# Altium PCB PCB1.PcbDoc
Units mil, origin at the board's own origin, x right, y up, seen from the top; angles counter-clockwise.
Board outline 6000 x 4000 mil, 2 copper layers (Top Layer, Bottom Layer); 18 components, 24 nets, 96 pads, 0 vias.
Unrouted connection lines stored in the file: 3.
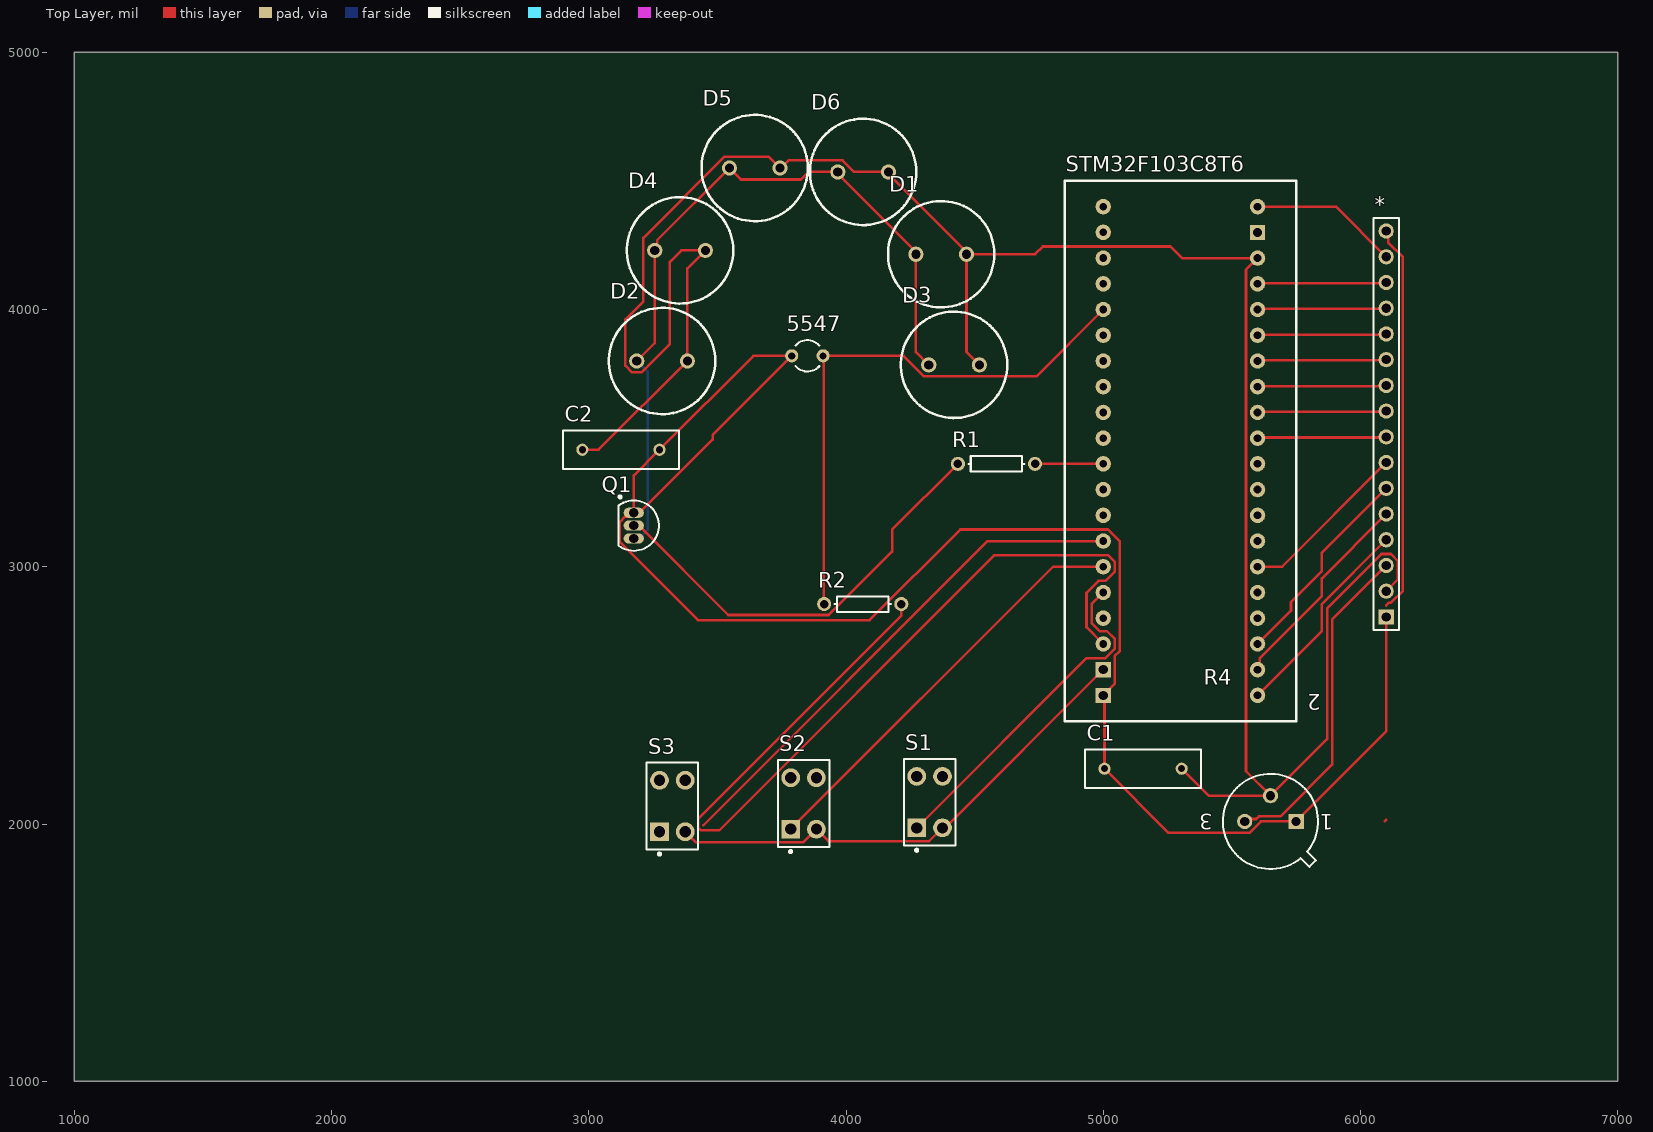
[diagram p0: Top Layer view]
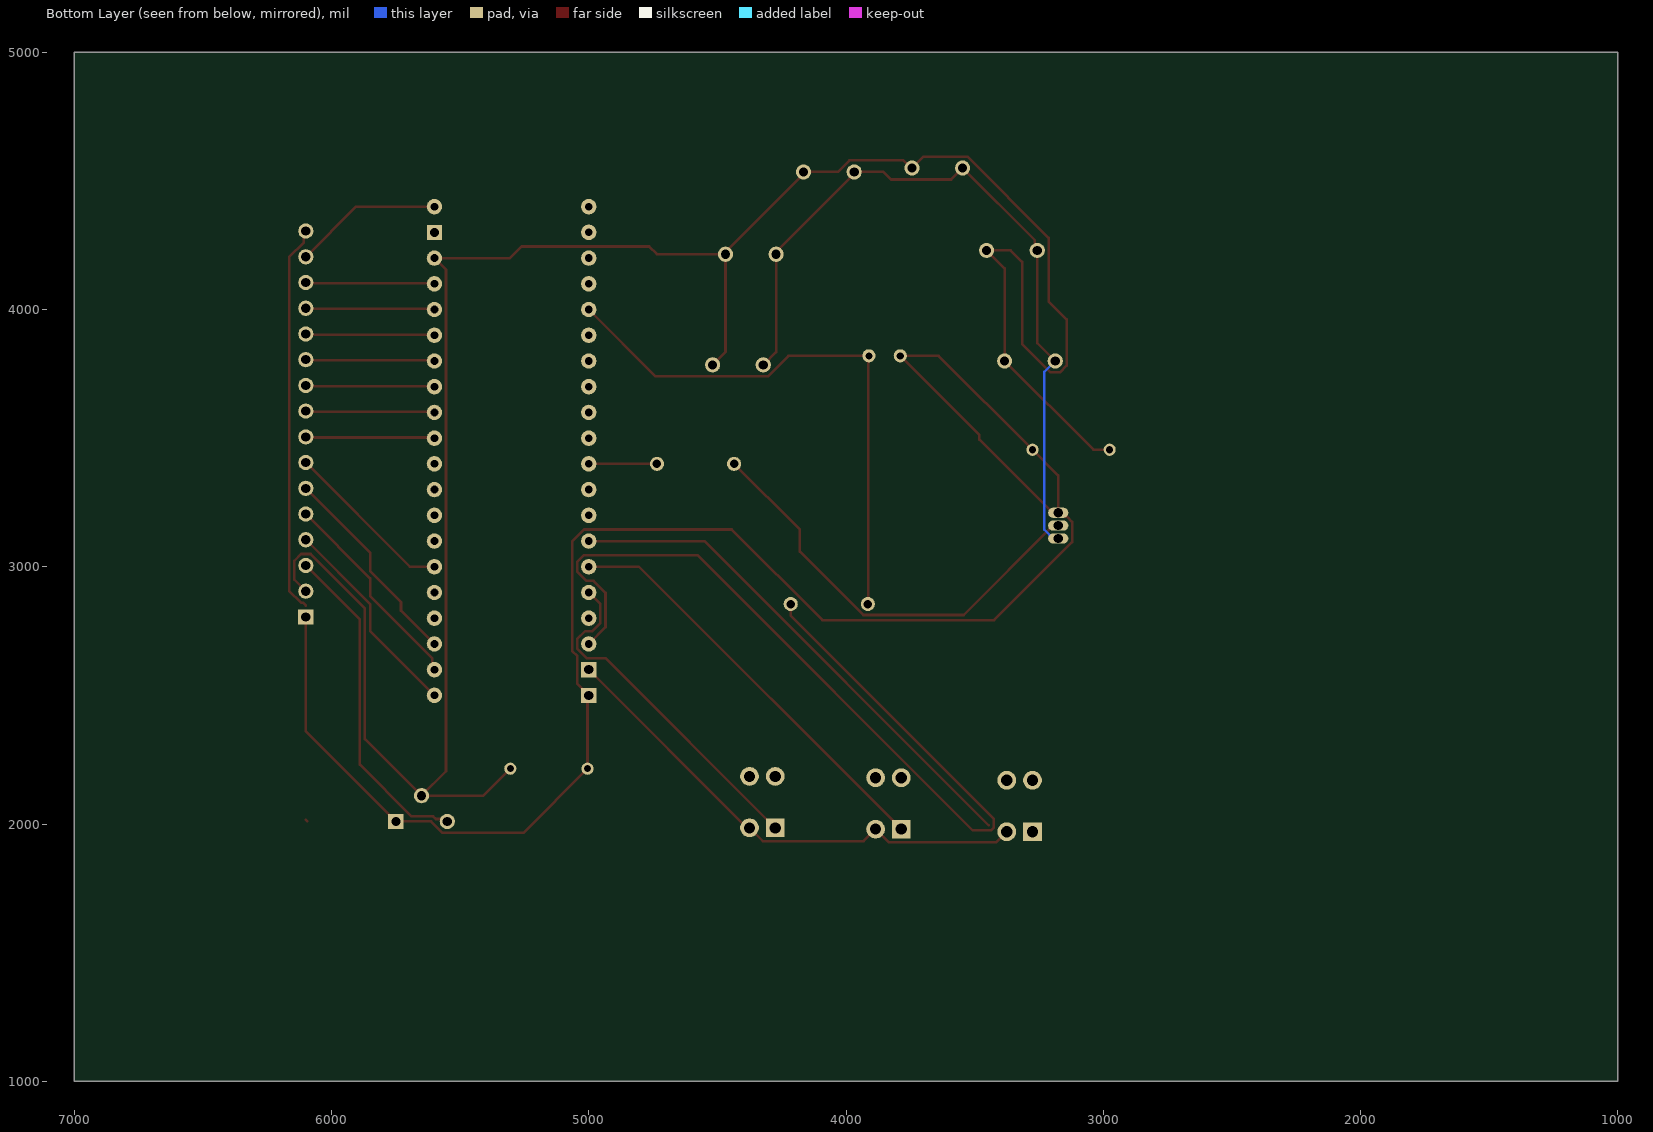
[diagram p1: Bottom Layer view, seen from below]

## Layer stack, top to bottom
Top Solder: solder mask 0.4, Solder Resist, Dk 3.5
Top Layer: signal copper 1.4
Dielectric 1: dielectric 12.6, FR-4, Dk 4.8
Bottom Layer: signal copper 1.4
Bottom Solder: solder mask 0.4, Solder Resist, Dk 3.5

## Board outline
1000,1000 7000,1000 7000,5000 1000,5000

## Design rules (kind name [scope] priority, off if disabled: settings)
Clearance [All] p1: gap=10 ignorepadtopadclearanceinfootprint=FALSE except(0: Arc-Hole Track-Hole SMDPad-Hole THPad-Hole Via-Hole Fill-Hole Poly-Hole Region-Hole Text-Hole)
PolygonConnect [All] p1: connectstyle=Relief reliefconductorwidth=10 reliefentries=4 polygonreliefangle="90 Angle" airgapwidth=10
RoutingVias [All] p1: holewidth=28 width=50 viastyle="Through Hole" minholewidth=28 minwidth=50 maxholewidth=28 maxwidth=50
SolderMaskExpansion [All] p1: expansion=4 istentingtop=FALSE
Width [All] p1: maxlimit=10 minlimit=10 preferedwidth=10
30 further rules are at their usual default settings.

## Components (designator, comment, footprint, x,y, rotation, side; value= is the part's Value field where it differs from the comment)
5547 "光敏电阻" R38 3850,3820 r90 top value=1K
* "LCD1602" HDR1X16 6100,2805 r90 top
C1 "104" RAD-0.3 5155,2215 r180 top value=100pF
C2 "104" RAD-0.3 3125,3455 r180 top value=100pF
D1 "LED" RB5-10.5 4370,4215 r180 top
D2 "LED" RB5-10.5 3285,3800 r180 top
D3 "LED" RB5-10.5 4420,3785 r180 top
D4 "LED" RB5-10.5 3355,4230 r180 top
D5 "LED" RB5-10.5 3645,4550 r180 top
D6 "LED" RB5-10.5 4066.57,4535 r180 top
Q1 "8550" TO-92A 3175,3160 r180 top
R1 "100" AXIAL-0.3 4585,3400 r180 top value=1K
R2 "Res1" AXIAL-0.3 4065,2855 r0 top value=1K
R4 "RPot" TO-205AF 5650,2010 r180 top value=10K
S1 "SW-PB" DPST-4 4325,2085 r90 top
S2 "SW-PB" DPST-4 3835,2080 r90 top
S3 "SW-PB" DPST-4 3325,2070 r90 top
STM32F103C8T6 "STM32F103C8T6" HDR1X20 4850,4500 r270 top

## Footprints (in the part's own frame and the unit in brackets; to place one, negate y for a bottom-side part, rotate by r counter-clockwise, add the part's x,y. Pads: shape width x height; smd on the part's side, far side on the other; paste and mask are expansions set on the pad)
AXIAL-0.3 [mm] "Axial Device, Thru-Hole; 2 Leads; 0.3 in Pin Spacing"
  round 1.4 hole 0.85: 1(-3.81,0) 2(3.81,0)
  silkscreen extent -2.77,-0.76 2.77,0.76
DPST-4 [mm] "Switch; 4 Leads"
  rect 1.85x1.85 hole 1.1: 1(-2.54,1.27)
  round 1.85 hole 1.1: 2(-2.54,-1.27) 3(2.54,-1.27) 4(2.54,1.27)
  silkscreen extent -4.88,-2.54 4.28,2.54
HDR1X16 [mm] "Connector; Header; 16 Position"
  rect 1.5x1.5 hole 0.9: 1(0,0)
  round 1.5 hole 0.9: 2(2.54,0) 3(5.08,0) 4(7.62,0) 5(10.16,0) 6(12.7,0) 7(15.24,0) 8(17.78,0) 9(20.32,0) 10(22.86,0) 11(25.4,0) 12(27.94,0) 13(30.48,0) 14(33.02,0) 15(35.56,0) 16(38.1,0)
  silkscreen extent -1.27,-1.27 39.37,1.27
HDR1X20 [mil] "Connector; Header; 20 Position"
  round 60 hole 30: 0(100,150) 1(200,150) 2(300,150) 3(400,150) 4(500,150) 5(600,150) 6(700,150) 7(800,150) 8(900,150) 9(1000,150) 10(1100,150) 11(1200,150) 12(1300,150) 13(1400,150) 14(1500,150) 15(1600,150) 16(1700,150) 17(1800,150) 20(2000,750) 21(1900,750) 22(1800,750) 23(1700,750) 24(1600,750) 25(1500,750) 26(1400,750) 27(1300,750) 28(1200,750) 29(1100,750) 30(1000,750) 31(900,750) 32(800,750) 33(700,750) 34(600,750) 35(500,750) 36(400,750) 37(300,750) 39(100,750)
  rect 59.06x59.06 hole 35.43: 18(1900,150) 19(2000,150) 38(200,750)
  silkscreen extent 0,0 2100,900
R38 [mm] "Crystal, Thru-Hole; 2 Leads; Body 3.1 x 8.2 mm (Dia.xH)"
  round 1.3 hole 0.7: 1(0,1.55) 2(0,-1.55)
  silkscreen extent -1.55,-1.19 1.55,1.17
RAD-0.3 [mm] "Radial Cap, Thru-Hole; 2 Leads; 0.3 in Pin Spacing"
  round 1.2 hole 0.7: 1(-3.81,0) 2(3.81,0)
  silkscreen extent -5.71,-1.91 5.71,1.91
RB5-10.5 [mm] "Capacitor (Radial); 2 Leads"
  round 1.5 hole 0.9: 1(-2.5,0) 2(2.5,0)
  silkscreen extent -5.25,-5.25 5.25,5.25
TO-92A [mm] "TO, Flat Index; 3 In-Line, Axial Leads; Body Dia. 4.5mm; Leads 0.51 x 0.48 mm (max)"
  oval 2x1 hole 0.9: 1(0,-1.27) 2(0,0) 3(0,1.27)
  silkscreen extent -2.48,-2.95 1.5,2.48, body extent -2.48,-2.5 1.5,2.5, height 6.86
TO-205AF [mm] "Can; 3 Leads; Pin Circle Dia. 5.08 mm; Lead Dia. 0.53 mm (max)"
  rect 1.5x1.5 hole 0.9: 1(-2.54,0)
  round 1.5 hole 0.9: 2(0,-2.54) 3(2.54,0)
  silkscreen extent -4.7,-4.7 4.7,4.7

## Part data
5547 R1: library part Res1, "Resistor", LatestRevisionDate=17-Jul-2002, LatestRevisionNote="Re-released for DXP Platform.", PackageDescription="Axial Device, Thru-Hole; 2 Leads; 0.3 in Pin Spacing", PackageReference=AXIAL-0.3, Published=8-Jun-2000, Publisher="Altium Limited"
C1 C2: library part Cap, "Capacitor", LatestRevisionDate=17-Jul-2002, LatestRevisionNote="Re-released for DXP Platform.", PackageDescription="Radial Cap, Thru-Hole; 2 Leads; 0.3 in Pin Spacing", PackageReference=RAD-0.3, Published=8-Jun-2000, Publisher="Altium Limited"
D1 D2 D3 D4 D5 D6: library part LED0, "Typical INFRARED GaAs LED", LatestRevisionDate=08-Jul-2005, LatestRevisionNote="Mech Layer 1 removed.", PackageDescription="LED; 2 Leads", PackageReference=LED-0, Published=8-Jun-2000, Publisher="Altium Limited"
Q1: library part PNP, "PNP Bipolar Transistor", LatestRevisionDate=29-May-2009, LatestRevisionNote="IPC-7351 Footprint Added.", PackageDescription="3-Pin SOT-23 Package 0.95 mm Pitch, 2.4 mm Lead Span", PackageReference=SOT-23B, PackageVersion=Aug-1999, Published=8-Jun-2000, Publisher="Altium Limited"
R2: "Resistor", LatestRevisionDate=17-Jul-2002, LatestRevisionNote="Re-released for DXP Platform.", PackageDescription="Axial Device, Thru-Hole; 2 Leads; 0.3 in Pin Spacing", PackageReference=AXIAL-0.3, Published=8-Jun-2000, Publisher="Altium Limited"
R4: "Potentiometer", LatestRevisionDate=17-Jul-2002, LatestRevisionNote="Re-released for DXP Platform.", PackageDescription="Variable Resistor, Thru-Hole; 3 Leads", PackageReference=VR5, Published=8-Jun-2000, Publisher="Altium Limited", Set Position=0.5, Sim Note="Enter the Resistance value and the set point into parameter fields."
S1 S2 S3: "Switch", LatestRevisionDate=17-Jul-2002, LatestRevisionNote="Re-released for DXP Platform.", PackageDescription="Switch; 2 Leads", PackageReference=SPST-2, Published=24-Mar-1999, Publisher="Altium Limited"

## Nets (pads, with @x,y where several pads share a name; then routed paths per layer and width w, separated by ;. In a path a pad name is that pad's centre, name@x,y a point inside that pad or via, vN(x,y) a via of type N, cw(c..) or ccw(c..) an arc to the next point about the centre after c; other vN are vias at no path point)
3.3V: R2.2 STM32F103C8T6.17 | length 3681.6
  Top Layer w10: R2.2 4215,2809.75 3425,2019.75 3425,1986.72 3436.72,1975 3507.28,1975 4577.28,3045 5018.64,3045 5045,3018.64 5045,2981.36 5008.64,2945 4981.36,2945 4935,2898.64 4935,2765 STM32F103C8T6.17
5V: *.2 C1.1 C2.2 D1.1 D2.1 D3.1 D4.1 D5.1 D6.1 R4.2 STM32F103C8T6.37 | length 9299.7
  Top Layer w10: C2.2 3038.43,3455 D2.1 3383.43,4160 D4.1 3359.83,4230 3315.31,4185.47 3315.31,3865.76 3205.02,3755.47 3168.13,3755.47 3142.05,3781.56 3142.05,3961.56 3212.05,4031.56 3212.05,4278.44 3528.13,4594.53 3698.9,4594.53 D5.1 3747.34,4550 3776.87,4579.53 3986.59,4579.53 4031.12,4535 D6.1 4165,4526.71 4468.43,4223.29 D1.1 ; D3.1 4468.43,3835 D1.1 ; C1.1 5410,2110 R4.2 ; *.2 6144.53,2949.53 6144.53,3023.44 6118.44,3049.53 6081.56,3049.53 5870.17,2838.14 5870.17,2330.17 R4.2 ; D1.1 4735.17,4215 4765.17,4245 5261.42,4245 5306.42,4200 STM32F103C8T6.37 5555,4155 5555,2205 R4.2
ADC1_IN0: 5547.2 R2.1 STM32F103C8T6.4 | length 2196.1
  Top Layer w10: R2.1 3913.01,2856.99 3913.01,3818.01 5547.2 4223.6,3820 4303.13,3740.47 4740.47,3740.47 STM32F103C8T6.4
GND: 5547.1 *.1 *.16 C1.2 C2.1 Q1.1 R4.1 STM32F103C8T6.19 | length 8452.7
  Top Layer w10: Q1.1 3175,3355 C2.1 3640,3820 5547.1 3481.56,3512.59 3481.56,3494.85 3181.4,3194.68 3140.95,3194.68 3120.63,3174.37 3120.63,3095.63 3423.82,2792.44 4092.25,2792.44 4444.81,3145 5018.64,3145 5065,3098.64 5065,2673.08 5044.53,2652.6 5044.53,2544.53 STM32F103C8T6.19 5005,2495 C1.2 5254.53,1965.47 5568.44,1965.47 5612.97,2010 R4.1 6100,2360 *.1 ; 6094.14,2010 6100,2015.86 ; 6100,2849.53 6110.94,2860.47 6118.44,2860.47 6164.53,2906.56 6164.53,4203.44 6107.5,4260.47 6107.5,4297.5 *.16
KEY_1: S1.1 STM32F103C8T6.15 | length 1349
  Top Layer w10: S1.1 4934.53,2644.53 5008.17,2644.53 5045,2681.36 5045,2718.64 5013.64,2750 4986.36,2750 4955,2781.36 4955,2855 STM32F103C8T6.15
KEY_2: S2.1 STM32F103C8T6.14 | length 1637.5
  Top Layer w10: S2.1 4805,3000 STM32F103C8T6.14
KEY_3: S3.1 STM32F103C8T6.13 | length 2012.7
  Top Layer w10: 3445,1995 4550,3100 STM32F103C8T6.13
KEY_GND: S1.2 S2.2 S3.2 STM32F103C8T6.18 | length 1958.7
  Top Layer w10: S3.2 3416.42,1928.58 3833.58,1928.58 S2.2 3931.42,1933.58 4323.58,1933.58 S1.2 4385,1985 STM32F103C8T6.18
LCD_3.3: *.15 STM32F103C8T6.39 | length 580.8
  Top Layer w10: STM32F103C8T6.39 5905,4400 *.15
LCD_D0: *.7 STM32F103C8T6.25 | length 667.8
  Top Layer w10: STM32F103C8T6.25 5695,3000 *.7
LCD_D1: *.8 STM32F103C8T6.30 | length 502.1
  Top Layer w10: STM32F103C8T6.30 5602.5,3502.5 6097.5,3502.5 *.8
LCD_D2: *.9 STM32F103C8T6.31 | length 502.1
  Top Layer w10: STM32F103C8T6.31 5602.5,3602.5 6097.5,3602.5 *.9
LCD_D3: *.10 STM32F103C8T6.32 | length 502.1
  Top Layer w10: STM32F103C8T6.32 5602.5,3702.5 6097.5,3702.5 *.10
LCD_D4: *.11 STM32F103C8T6.33 | length 502.1
  Top Layer w10: STM32F103C8T6.33 5602.5,3802.5 6097.5,3802.5 *.11
LCD_D5: *.12 STM32F103C8T6.34 | length 502.1
  Top Layer w10: STM32F103C8T6.34 5602.5,3902.5 6097.5,3902.5 *.12
LCD_D6: *.13 STM32F103C8T6.35 | length 502.1
  Top Layer w10: STM32F103C8T6.35 5602.5,4002.5 6097.5,4002.5 *.13
LCD_D7: *.14 STM32F103C8T6.36 | length 502.1
  Top Layer w10: STM32F103C8T6.36 5602.5,4102.5 6097.5,4102.5 *.14
LCD_EN: *.6 STM32F103C8T6.22 | length 812.1
  Top Layer w10: STM32F103C8T6.22 5729.83,2829.83 5729.83,2863.11 5850.09,2983.37 5850.09,3055.09 *.6
LCD_RS: *.4 STM32F103C8T6.20 | length 812.1
  Top Layer w10: STM32F103C8T6.20 5850.09,2750.09 5850.09,2855.09 *.4
LCD_RW: *.5 STM32F103C8T6.21 | length 812.1
  Top Layer w10: STM32F103C8T6.21 5608.64,2608.64 5608.64,2645 5850.09,2886.45 5850.09,2955.09 *.5
Net*_3: *.3 R4.3 | length 1293
  Top Layer w10: R4.3 5559.39,2019.39 5594.07,2019.39 5604.69,2030 5689.73,2030 5890.17,2230.44 5890.17,2795.17 *.3
NetD1_2: D1.2 D2.2 D3.2 D4.2 D5.2 D6.2 Q1.3 | length 2989.5
  Top Layer w10: D2.2 3256.57,3870 D4.2 3265.96,4239.39 3265.96,4269.39 D5.2 3591.1,4505.47 3825.16,4505.47 3854.69,4535 D6.2 3968.15,4526.71 4271.57,4223.29 4271.57,3835 D3.2
  Bottom Layer w10: Q1.3 3194.68,3110 3229.37,3144.69 3229.37,3757.2 D2.2
NetQ1_2: Q1.2 R1.2 | length 1697.2
  Top Layer w10: Q1.2 3194.68,3160 3542.24,2812.44 3932.63,2812.44 4179.5,3059.31 4179.5,3144.5 R1.2
TIME3_TH1: R1.1 STM32F103C8T6.10 | length 265
  Top Layer w10: R1.1 STM32F103C8T6.10
pads on no net: S1.3 S1.4 S2.3 S2.4 S3.3 S3.4 STM32F103C8T6.0 STM32F103C8T6.1 STM32F103C8T6.2 STM32F103C8T6.3 STM32F103C8T6.5 STM32F103C8T6.6 STM32F103C8T6.7 STM32F103C8T6.8 STM32F103C8T6.9 STM32F103C8T6.11 STM32F103C8T6.12 STM32F103C8T6.16 STM32F103C8T6.23 STM32F103C8T6.24 STM32F103C8T6.26 STM32F103C8T6.27 STM32F103C8T6.28 STM32F103C8T6.29 STM32F103C8T6.38

## Text inside footprints (layer, text, board x,y; h text height)
R4: Top Overlay "3" at 5425.83,2039.57 h59.05 r180; Top Overlay "2" at 5845,2505 h59.05 r180; Top Overlay "1" at 5894.13,2037.44 h59.05 r180